# Altium PCB PCB2.PcbDoc
Units mil, origin at the board's own origin, x right, y up, seen from the top; angles counter-clockwise.
Board outline 4085.01 x 3735.03 mil, 2 copper layers (Top Layer, Bottom Layer); 45 components, 46 nets, 224 pads, 0 vias.
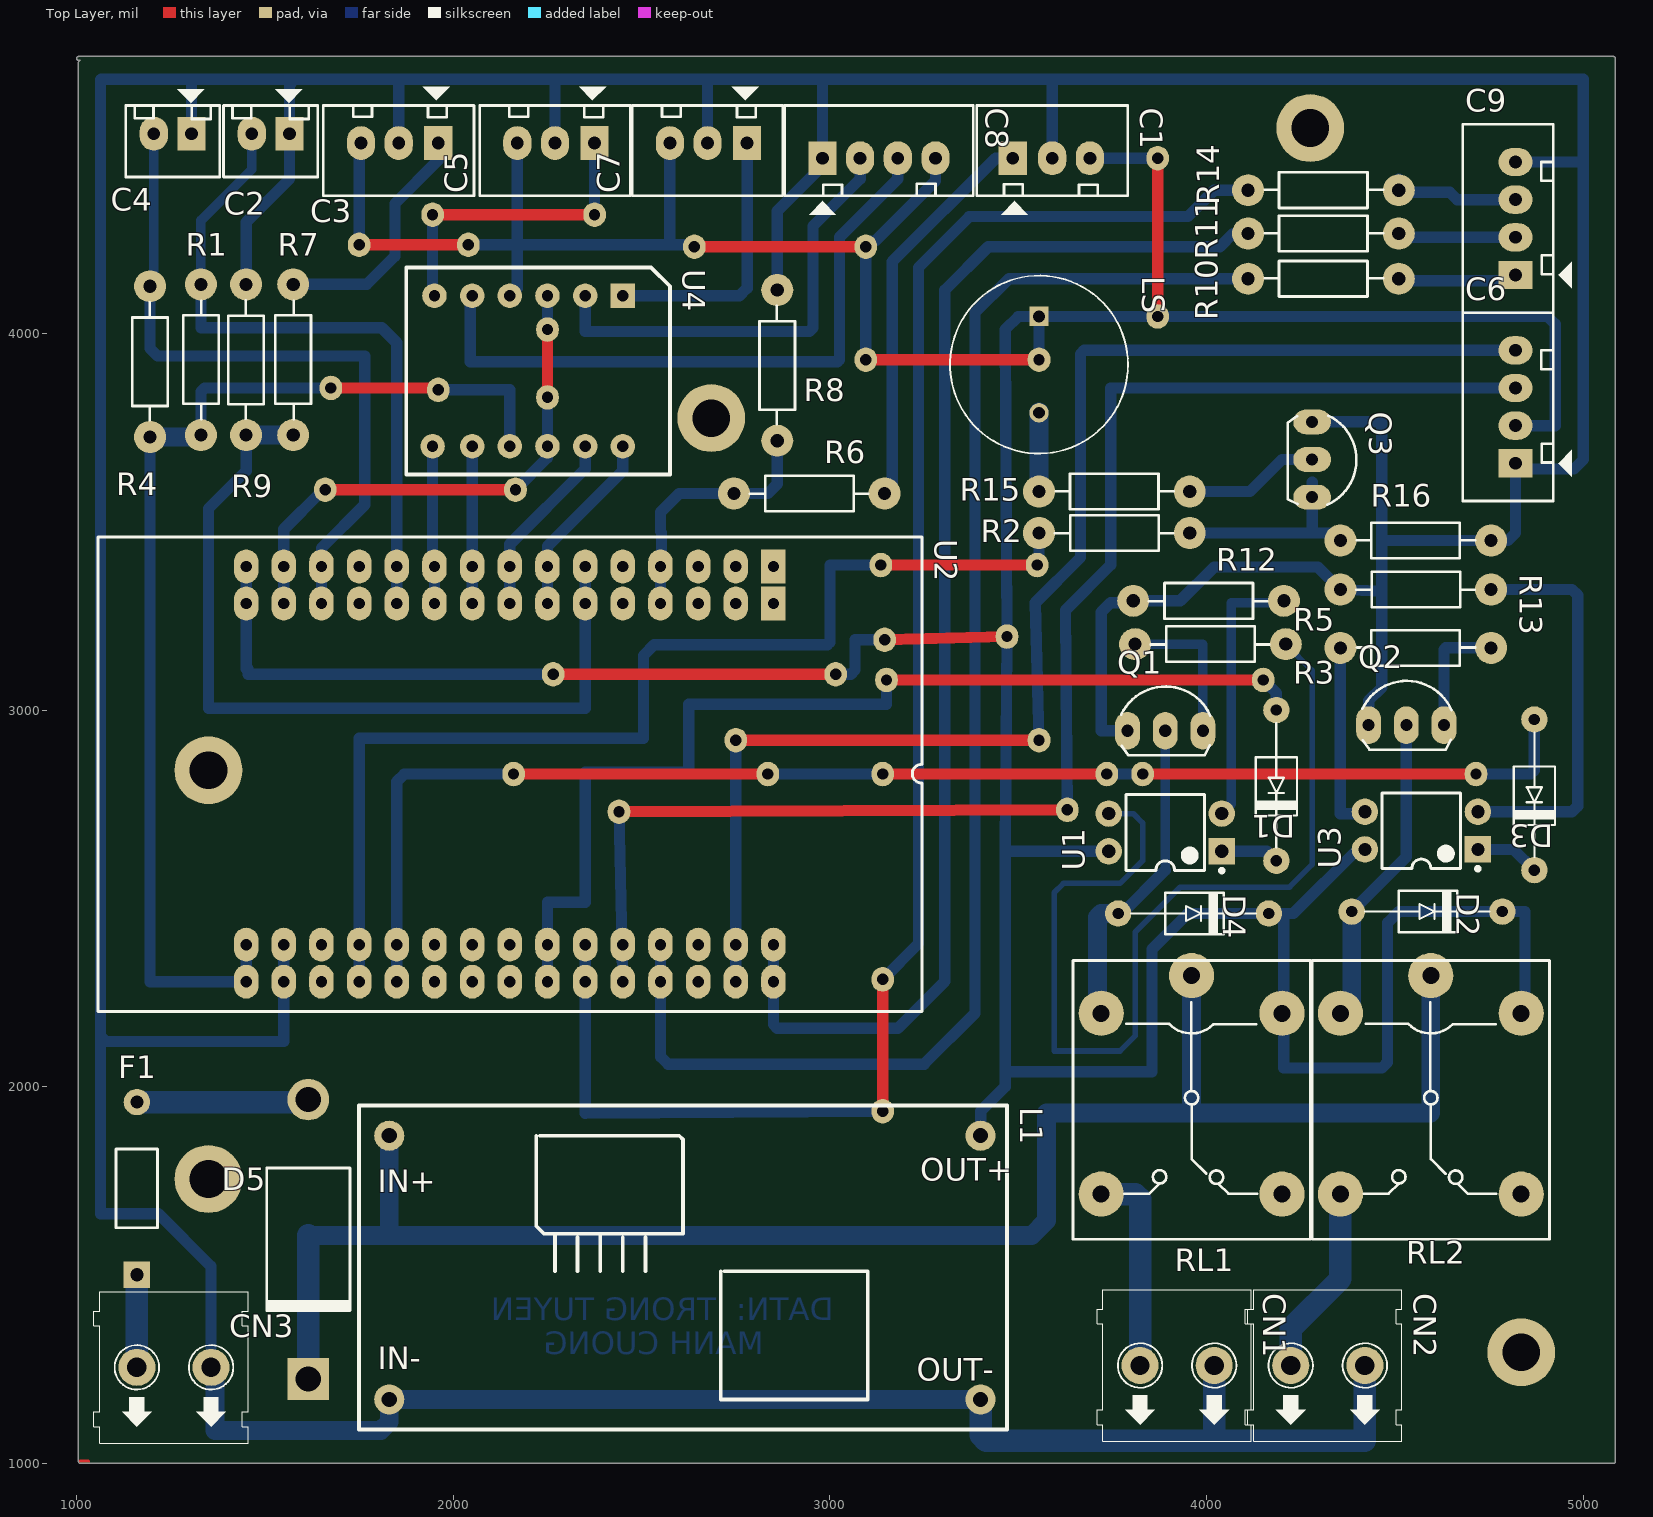
[diagram p0: Top Layer view]
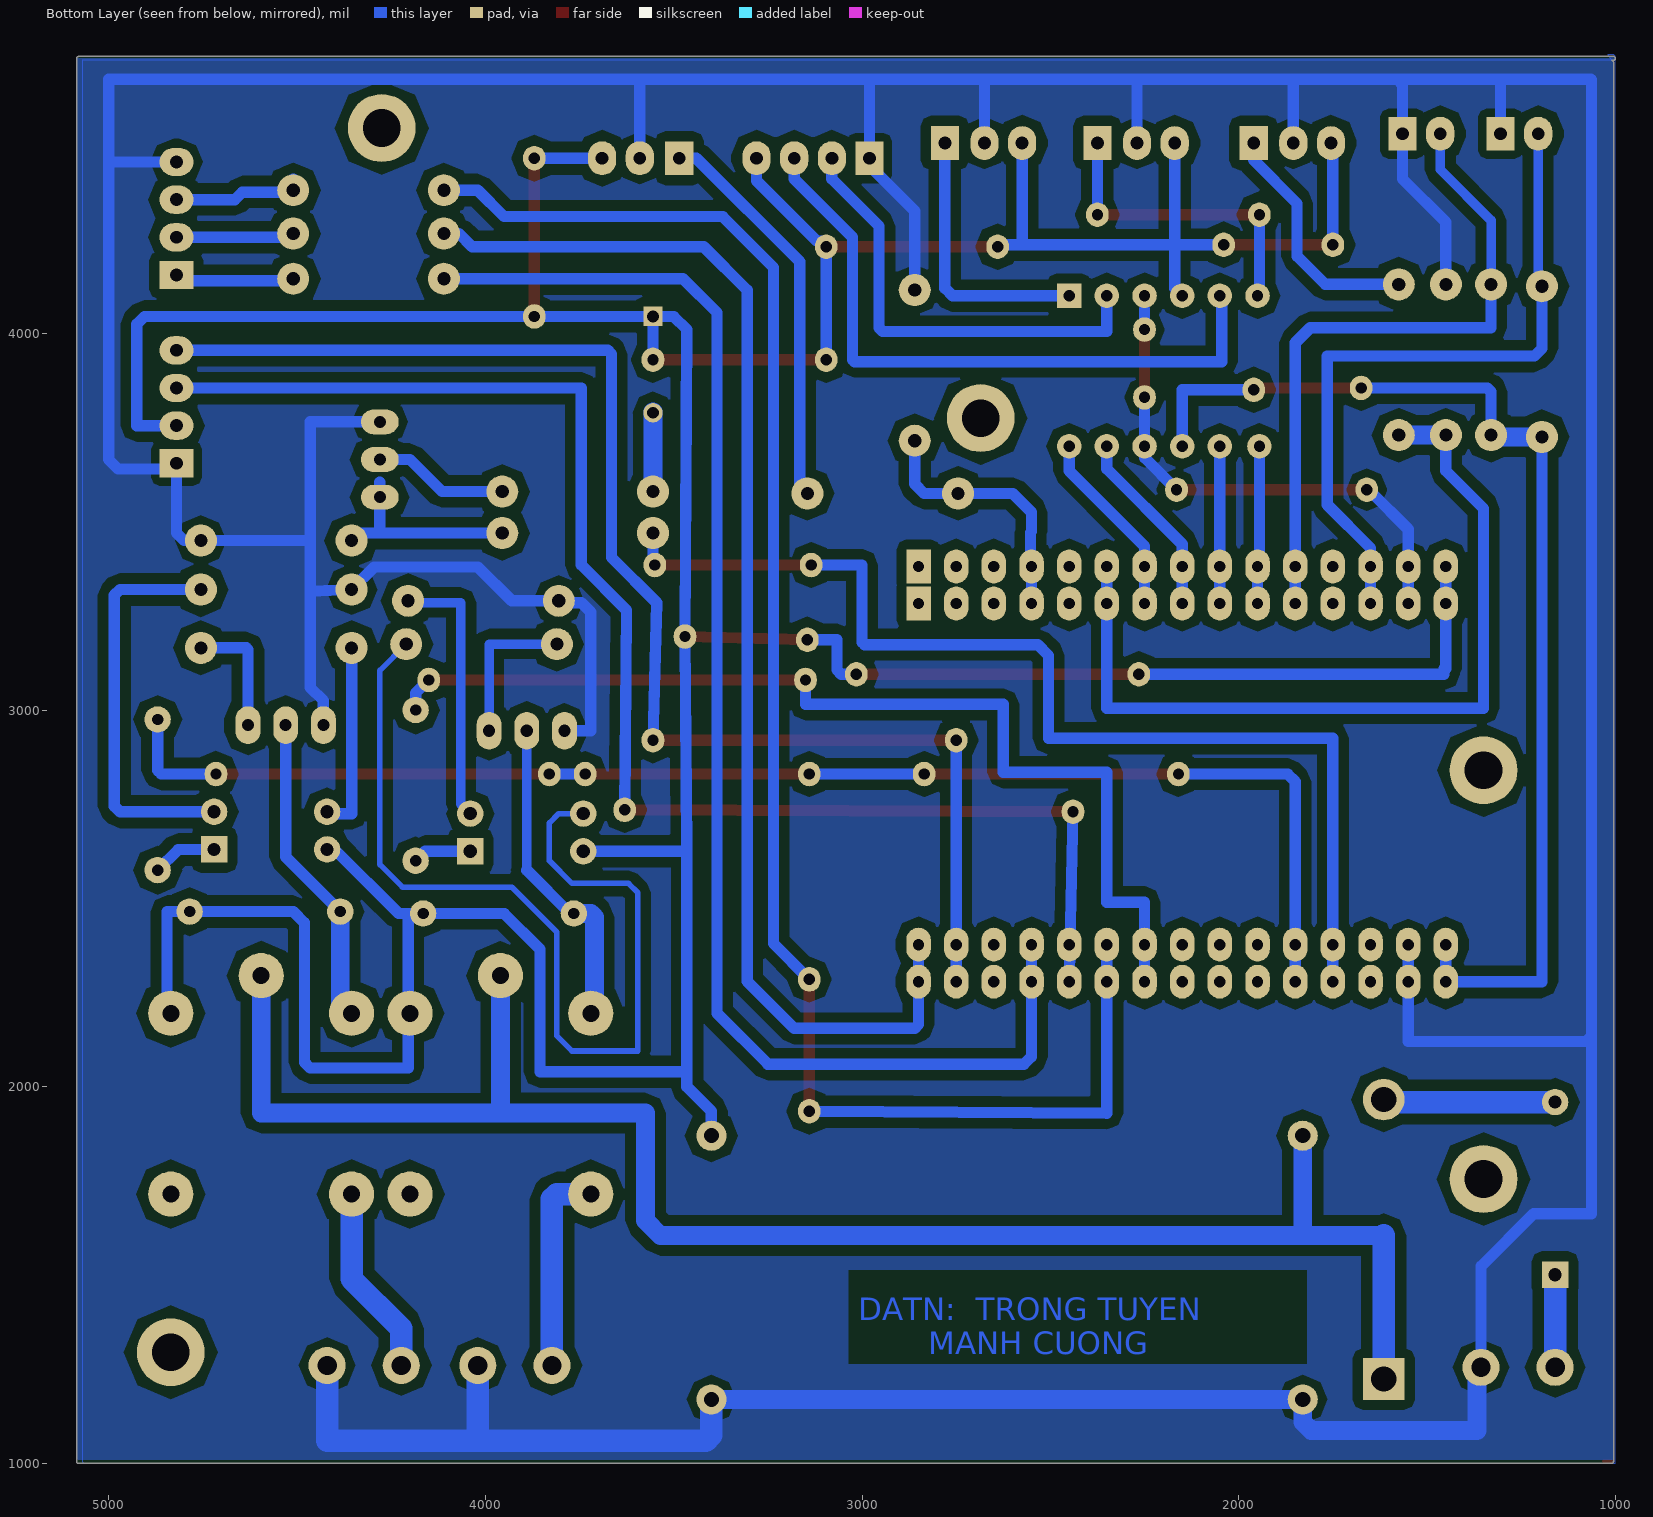
[diagram p1: Bottom Layer view, seen from below]
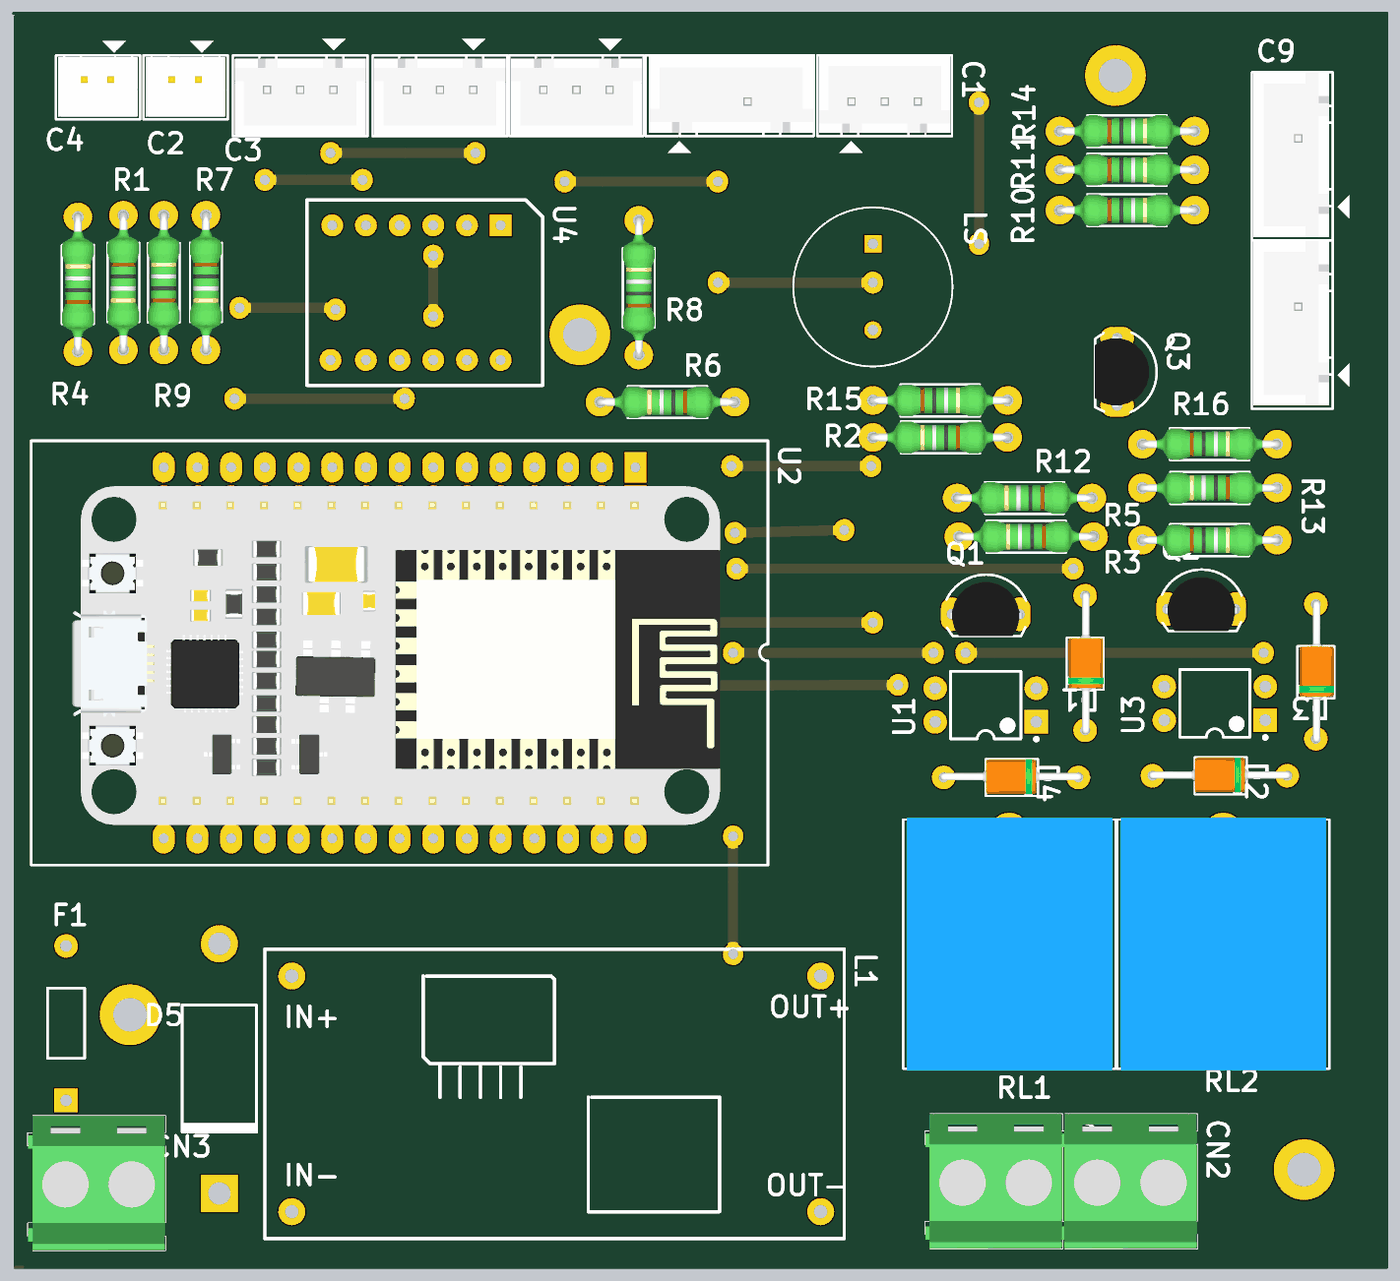
[diagram p2: 3D render of the assembled board from above, using the file's embedded part models]

## Layer stack, top to bottom
Top Solder: solder mask 0.4, Solder Resist, Dk 3.5
Top Layer: signal copper 1.4
Dielectric 1: dielectric 12.6, FR-4, Dk 4.8
Bottom Layer: signal copper 1.4
Bottom Solder: solder mask 0.4, Solder Resist, Dk 3.5

## Board outline
1004.99,1005 1004.99,4720 cw(c1010,4720) 1009.45,4724.98 1005,4724.98 cw(c1005,4730) 1005,4735.02 5080,4735.02 cw(c5080,4730) 5085.02,4730 5085.02,1005 cw(c5080,1005) 5080,999.99 1010,999.99 cw(c1010,1005)

## Design rules (kind name [scope] priority, off if disabled: settings)
Clearance [All] p1: gap=25
PlaneClearance [InNet('24VDC')] p1: clearance=40
PolygonConnect [All] p1: connectstyle=Relief reliefconductorwidth=30 reliefentries=4 polygonreliefangle="90 Angle" airgapwidth=20
RoutingVias [All] p1: holewidth=28 width=50 viastyle="Through Hole" minholewidth=28 minwidth=50 maxholewidth=28 maxwidth=50
SolderMaskExpansion [All] p1: expansion=4
Width [All] p1: maxlimit=50 minlimit=15 preferedwidth=30 minimp=50.000000 maximp=50.000000 favimp=50.000000
29 further rules are at their usual default settings.

## Components (designator, comment, footprint, x,y, rotation, side; value= is the part's Value field where it differs from the comment)
C1 "SS_pH" Header3 3490,4465 r0 top
C2 "BUTTON" Header2 1565,4530 r180 top
C3 "SS_TDS1" Header3 1955,4505 r180 top
C4 "M.NUOC" Header2 1305,4530 r180 top
C5 "L.LUONG" Header3 2370,4505 r180 top
C6 "LCD I2C" Header4 4820,3655 r90 top
C7 "BONUS" Header3 2775,4505 r180 top
C8 "SS SieuAm" Header4 2980,4465 r0 top
C9 "LED RGB" Header4 4820,4155 r90 top
CN1 "Domino2" Domino2 3823.15,1260 r270 top
CN2 "Domino2" Domino2 4223.15,1260 r270 top
CN3 "Domino2" Domino2 1160,1255 r270 top
D1 "Diode" DIO-1A 4185,3000 r270 top
D2 "Diode" DIO-1A 4385,2465 r0 top
D3 "Diode" DIO-1A 4870,2975 r270 top
D4 "Diode" DIO-1A 3765,2460 r0 top
D5 "SR5200-5A" DO-201AD 1615,1595 r270 top
F1 "Fuse Thermal" PIN-W2/E2.8 1160,1730 r90 top
L1 "BUCK_LM2596" BUCK_LM2596 2600,1550 r0 top
LS "BUZZER" XDCR_MCKPM-G1201A-K4037 3555,3917.05 r270 top
Q1 "C1815" TO92-123 3890,2945 r0 top
Q2 "C1815" TO92-123 4530,2960 r0 top
Q3 "C1815" TO92-123 4280,3665 r270 top
R1 "Res" RES-1/4W 1335,3945 r90 top
R2 "Res" RES-1/4W 3770,3465 r0 top
R3 "Res" RES-1/4W 4025,3170 r0 top
R4 "Res" RES-1/4W 1190,3910 r270 top
R5 "Res" RES-1/4W 4540,3170 r180 top
R6 "Res" RES-1/4W 2960,3570 r0 top
R7 "Res" RES-1/4W 1580,3945 r90 top
R8 "Res" RES-1/4W 2855,3900 r270 top
R9 "Res" RES-1/4W 1445,3915 r270 top
R10 "Res" RES-1/4W 4295,4150 r180 top
R11 "Res" RES-1/4W 4295,4270 r180 top
R12 "Res" RES-1/4W 4020,3285 r0 top
R13 "Res" RES-1/4W 4570,3315 r0 top
R14 "Res" RES-1/4W 4295,4385 r180 top
R15 "Res" RES-1/4W 3740,3585 r180 top
R16 "Res" RES-1/4W 4540,3455 r180 top
RL1 "Relay 10A/12V" "RELAY 5" 3960,1970 r270 top
RL2 "Relay 10A/12V" "RELAY 5" 4595,1970 r270 top
U1 "OPTO PC817" DIP-4 3890,2675 r180 top
U2 "ESP8266 MCU" ESP8266_CH340 2150,2830 r270 top
U3 "OPTO PC817" DIP-4 4570,2680 r180 top
U4 "Convert" PCB-Convert 2475,4075 r270 top

## Footprints (in the part's own frame and the unit in brackets; to place one, negate y for a bottom-side part, rotate by r counter-clockwise, add the part's x,y. Pads: shape width x height; smd on the part's side, far side on the other; paste and mask are expansions set on the pad)
BUCK_LM2596 [mil]
  round 80 hole 40: 1(-770,320) 2(-770,-380) 3(800,-380) 4(800,320)
  silkscreen extent -850,-460 870,400
DIO-1A [mil]
  round 70 hole 30: 1(0,0) 2(400,0)
  silkscreen extent 35,-55 365,55, body extent -11,-50 411,54, height 102
DIP-4 [mil] "DIP; 4 Leads; Row Spacing 7.62 mm; Pitch 2.54 mm"
  rect 70x70 hole 35: 1(-150,50)
  round 70 hole 35: 2(-150,-50) 3(150,-50) 4(150,50)
  silkscreen extent -155,-100 104,106, body extent -124,-98 124,98, height 220
DO-201AD [mm] "Diode, Axial; Body 9.5 x 5.6 mm (LxDia. max), Lead Dia. 1.32 mm (max)"
  round 2.8 hole 1.7: 1(-9.42,0)
  rect 2.8x2.8 hole 1.7: 2(9.42,0)
  silkscreen extent -4.8,-2.8 4.9,2.8
Domino2 [mm]
  round 2.5 hole 1.3: 1(0,0) 2(0,5)
  silkscreen extent -5.1,-2.9 5.1,7.5, body extent -5.1,-2.85 5.1,7.45, height 14.3
ESP8266_CH340 [mil]
  rect 90x65 hole 30: 1(-551.18,700) 1(-452.76,700)
  oval 90x65 hole 30: 2(-551.18,600) 2(-452.76,600) 3(-551.18,500) 3(-452.76,500) 4(-551.18,400) 4(-452.76,400) 5(-551.18,300) 5(-452.76,300) 6(-551.18,200) 6(-452.76,200) 7(-551.18,100) 7(-452.76,100) 8(-551.18,0) 8(-452.76,0) 9(-551.18,-100) 9(-452.76,-100) 10(-551.18,-200) 10(-452.76,-200) 11(-551.18,-300) 11(-452.76,-300) 12(-551.18,-400) 12(-452.76,-400) 13(-551.18,-500) 13(-452.76,-500) 14(-551.18,-600) 14(-452.76,-600) 15(-551.18,-700) 15(-452.76,-700) 16(452.76,-700) 16(551.18,-700) 17(452.76,-600) 17(551.18,-600) 18(452.76,-500) 18(551.18,-500) 19(452.76,-400) 19(551.18,-400) 20(452.76,-300) 20(551.18,-300) 21(452.76,-200) 21(551.18,-200) 22(452.76,-100) 22(551.18,-100) 23(452.76,0) 23(551.18,0) 24(452.76,100) 24(551.18,100) 25(452.76,200) 25(551.18,200) 26(452.76,300) 26(551.18,300) 27(452.76,400) 27(551.18,400) 28(452.76,500) 28(551.18,500) 29(452.76,600) 29(551.18,600) 30(452.76,700) 30(551.18,700)
  silkscreen extent -630,-1094 630,1094, body extent -495,-971 511,951, height 486
Header2 [mil] "CON2"
  rect 75x90 hole 34: 1(0,0)
  oval 75x90 hole 34: 2(100,0)
  silkscreen extent -75,-118 175,115, body extent -68,-70 168,107, height 236
Header3 [mil] "CON 3"
  rect 75x90 hole 34: 1(-5,0)
  oval 75x90 hole 34: 2(100,0) 3(200,0)
  silkscreen extent -100,-150 300,140, body extent -95,-90 295,136, height 276
Header4 [mil] "CON4"
  rect 75x90 hole 34: 1(0,0)
  oval 75x90 hole 34: 2(100,0) 3(200,0) 4(300,0)
  silkscreen extent -100,-150 400,140, body extent -90,-90 398,136, height 276
PCB-Convert [mil]
  rect 65x65 hole 30: 1(-25,-25)
  round 65 hole 30: 2(-25,-125) 3(-25,-225) 4(-25,-325) 5(-25,-425) 6(-25,-525) 7(375,-530) 8(375,-425) 9(375,-325) 10(375,-225) 11(375,-125) 12(375,-25)
  silkscreen extent -100,-600 450,100
PIN-W2/E2.8 [mil] "Thru-Hole; 2 Leads"
  rect 70x70 hole 35: 1(-229.33,0)
  round 70 hole 35: 2(229.33,0)
  silkscreen extent -104,-55 104,55
"RELAY 5" [mil] "Reley DPDT, 8 pin, 1A, W400mil, L800mil,H 300mil"
  round 120 hole 45: 1(-325,0) 2(255,240) 3(255,-240) 4(-225,-240) 5(-225,240)
  silkscreen extent -365,-315 375,315, body extent -371,-304 381,306, height 602
RES-1/4W [mil]
  round 85 hole 35: 1(-215,5) 2(185,5)
  silkscreen extent -173,-42 141,52, body extent -227,-42 197,52, height 95
TO92-123 [mil] "TO-92"
  oval 66x100 hole 32: 1(-100,0) 2(0,0) 3(100,0)
  silkscreen extent -117,-65 120,118, body extent -109,-66 109,95, height 245
XDCR_MCKPM-G1201A-K4037 [mm]
  rect 1.308x1.308 hole 0.8: 1(-3.25,0)
  round 1.308 hole 0.8: 2(3.25,0)
  silkscreen extent -6,-6 6,6

## Part data
C1 C3 C5 C7: library part Header3, "Header IDC, 3 x 1 Pin Vertical 2.54mm Pitch (Non-Boxed, Male)"
C2 C4: library part Header2, "Header IDC, 2 x 1 Pin Vertical 2.54mm Pitch (Non-Boxed, Male)"
C6 C8 C9: library part Header4, "Header IDC, 4 x 1 Pin Vertical 2.54mm Pitch (Non-Boxed, Male)"
D1 D2 D3 D4: "Default Diode"
D5: library part "Diode 1N5408", "3 Amp Medium Power Silicon Rectifier Diode"
F1: "Thermal Fuse"
LS: library part MCKPM-G1201A-K4037, "Zumbador y transductor magnéticos"
Q1 Q2 Q3: "NPN 600mW, ECB"
RL1 RL2: library part "Relay 5", "Relay SPDT,10A - 12VDC 5 Pin"
U1 U3: library part Optoisolator1, "4-Pin Phototransistor Optocoupler"
U4: library part "Convert Voltage Communication"

## Free pads (board coordinates)
  oval 60x65 hole 30: 2(3140,1935) 4(3140,2285) 7(3555,2920) 9(3630,2735) 11(2440,2730) 12(2750,2920) 13(1945,4315) 14(2375,4315) 15(1675,3855) 17(1960,3850) 18(3870,4045) 19(3870,4465) 20(2040,4235) 21(1750,4235) 22(3095,4230) 24(2640,4230) 25(3095,3930) 26(3555,3930) 27(2265,3095) 28(3015,3095) 29(3145,3186.48) 30(3469.91,3195) 31(3135,3385) 32(3550,3385) 33(1660,3585) 34(2165,3585) 37(3150,3080) 38(4150,3080) 39(2160,2830) 40(2835,2830) 41(3140,2830) 42(3735,2830) 43(3830,2830) 44(4715,2830) 45(2250,3830) 46(2250,4010)
  round 180 hole 100: 47(4835,1295) 48(4275,4545) 49(1350,1755) 50(1350,2840) 50(2685,3775)

## Nets (pads, with @x,y where several pads share a name; then routed paths per layer and width w, separated by ;. In a path a pad name is that pad's centre, name@x,y a point inside that pad or via, vN(x,y) a via of type N, cw(c..) or ccw(c..) an arc to the next point about the centre after c; other vN are vias at no path point)
3.3V: pad.15 pad.17 R1.1 R4.2 U2.16 U4.9 | length 3000.8
  Top Layer w30: pad.15 pad.17@1950,3855
  Bottom Layer w30: R4.2 1195,2278.82 1450,2278.82 U2.16@1450,2377.24 ; R1.1@1325,3725 R1.1 1330,3845 1340,3855 pad.15@1660,3855 ; pad.17 2150,3850 U4.9
  Bottom Layer w50: R4.2 R1.1@1325,3725
24VDC: D5.2 L1.1 RL1.1 RL2.1 | length 4657.4
  Bottom Layer w50: 1615,1605 1830,1605 ; L1.1 1830,1605 ; RL1.1 3960,2010 3960,1930 ; RL2.1 4595,1930 3960,1930 ; 1830,1605 3535,1605 3575,1645 3575,1930 3960,1930
  Bottom Layer w60: D5.2 1615,1605
Bonus: U2.7 U4.12 | length 500.1
  Bottom Layer w30: U2.7@2250,3282.76 2250,3381.18 2250,3435 2450,3635 U4.12
Bonus1: C7.1 U4.1 | length 723.3
  Bottom Layer w30: U4.1 2760,4100 2780,4120 C7.1
Button: C2.2 R1.2 U2.11 | length 1799.7
  Bottom Layer w25: R1.2 1330,4300 1465,4435 C2.2
  Bottom Layer w30: R1.2 1330,4015 1810,4015 1850,3975 1850,3381.18 U2.11@1850,3282.76
BUZZER: pad.31 pad.32 R2.1 U2.19 | length 2972.7
  Top Layer w30: pad.31 pad.32
  Bottom Layer w30: U2.19@1750,2278.82 1750,2377.24 1750,2925 2505,2925 2505,3145 2533.64,3173.64 2993.64,3173.64 3000,3180 3000,3385 pad.31 ; pad.32 3555,3390 R2.1
ENA: U2.9 U4.8 | length 417.2
  Bottom Layer w30: U2.9@2050,3282.76 2050,3381.18 U4.8
ENA1: C8.3 U4.5 | length 1758.3
  Bottom Layer w30: U4.5 2045,4095 2045,3925 3020,3925 3025,3930 3025,4255 3180,4410 C8.3
GND: C1.2 C2.1 C3.2 C4.1 C5.2 C6.1 C7.2 C8.1 C9.4 CN1.2 CN2.2 CN3.2 L1.2 L1.3 pad.33 pad.34 pad.45 pad.46 Q1.1 Q2.1 Q3.1 R8.1 R9.1 R12.1 R13.1 R16.1 U2.14 U2.17 U4.10 | length 19642.2
  Top Layer w30: pad.33 pad.34 ; pad.45 pad.46
  Bottom Layer w30: C4.1 1305,4665 1315,4675 ; CN3.2 1356.85,1523.15 1216.85,1663.15 1063.15,1663.15 1063.15,2135 ; R9.1 1450,4295 1565,4410 C2.1 1565,4660 1580,4675 ; U2.17@1550,2377.24 1550,2278.82 1550,2120 1078.15,2120 1063.15,2135 ; U2.14@1550,3282.76 1550,3381.18 1550,3480 pad.33@1650,3580 ; C3.2 1855,4665 1865,4675 ; pad.34 2250,3670 U4.10 pad.45 ; pad.46 2250,4064.29 ; C5.2 2270,4670 2275,4675 ; C7.2 2675,4665 2665,4675 ; R8.1 2860,4325 2980,4445 C8.1 2980,4670 2985,4675 ; C1.2@3590,4505 3590,4675 ; Q1.1 3720,2945 3720,3260 3745,3285 R12.1@3805,3285 ; R12.1 3930,3290 4020,3380 4295,3380 R13.1 4463.87,3315.05 4465,3316.19 ; Q3.1 4465,3765 4465,3450 ; Q2.1 4430,3025 4465,3060 4465,3316.19 ; C9.4 5000,4455 ; 1063.15,2135 1063.15,4673.15 1065,4675 1315,4675 ; 1315,4675 1580,4675 ; 1580,4675 1865,4675 ; 1865,4675 2275,4675 ; 2275,4675 2665,4675 ; 2665,4675 2985,4675 ; 2985,4675 3590,4675 ; 3590,4675 5000,4675 5000,4455 ; 4465,3316.19 4465,3450 ; 4465,3450 R16.1 4800,3450 4820,3470 4820,3640 4975,3640 5000,3665 5000,4455
  Bottom Layer w50: CN3.2 1367.5,1244.35 1367.5,1087.5 1807.5,1087.5 1830,1110 L1.2 L1.3
  Bottom Layer w60: L1.3 3400,1075 3415,1060 4020,1060 ; CN1.2 4020,1060 ; CN2.2 4420,1060 4020,1060
L.Luong: U2.10 U4.7 | length 419.3
  Bottom Layer w30: U4.7 1945,3386.18 1950,3381.18 U2.10@1950,3282.76
L.Luong1: C5.1 pad.13 pad.14 U4.6 | length 837.1
  Top Layer w30: pad.13 pad.14
  Bottom Layer w30: pad.13 1945,4105 U4.6 ; pad.14 C5.1
LED_B: R10.2 U2.27 | length 3818.7
  Bottom Layer w30: U2.27@2550,2377.24 2550,2278.82 2550,2080 2570,2060 3250,2060 3385,2195 3385,4055 3475,4145 R10.2
LED_G: R11.2 U2.30 | length 3425.3
  Bottom Layer w30: U2.30@2850,2377.24 2850,2278.82 2850,2165 2860,2155 3180,2155 3305,2280 3305,4115 3420,4230 4035,4230 4070,4265 R11.2
LED_R: pad.2 pad.4 R14.2 U2.25 | length 4493.6
  Top Layer w30: pad.4@3135,2290 pad.4 pad.2
  Bottom Layer w30: U2.25@2350,2377.24 2350,2278.82 2350,1930 pad.2 pad.2@3130,1935 ; pad.4 3235,2380 3235,4175 3370,4310 3950,4310 4020,4380 R14.2
M.Nuoc: C4.2 R4.1 U2.13 | length 1857.3
  Bottom Layer w25: R4.1 1205,4135 C4.2
  Bottom Layer w30: R4.1 1195,3960 1215,3940 1765,3940 1765,3545 1650,3430 1650,3381.18 U2.13@1650,3282.76
MOTOR: D1.1 pad.37 pad.38 U2.24 | length 2785.7
  Top Layer w30: pad.37 pad.38@4140,3080
  Bottom Layer w30: U2.24@2250,2278.82 2250,2377.24 2250,2490 2350,2490 2350,2835 2625,2835 2625,3015 3150,3015 pad.37 ; pad.38 4185,3045 D1.1
NetC9_1: C9.1 R10.1 | length 326.6
  Bottom Layer w30: R10.1@4510,4165 4535,4140 4805,4140 C9.1
NetC9_2: C9.2 R11.1 | length 320.4
  Bottom Layer w30: R11.1@4510,4280 4535,4255 C9.2
NetC9_3: C9.3 R14.1 | length 332.8
  Bottom Layer w30: R14.1@4510,4410 4545,4375 4645,4375 4665,4355 C9.3
NetCN1_1: CN1.1 RL1.3 | length 550.4
  Bottom Layer w60: RL1.3 3810,1715 3823.15,1701.85 CN1.1
NetCN2_1: CN2.1 RL2.3 | length 509.6
  Bottom Layer w60: CN2.1 4223.15,1358.15 4355,1490 RL2.3
NetCN3_1: CN3.1 F1.1 | length 245.7
  Bottom Layer w60: CN3.1 F1.1
NetD1_2: D1.2 U1.1 | length 155.4
  Bottom Layer w30: U1.1 4160,2625 D1.2
NetD2_1: D2.1 Q2.2 RL2.4 | length 767.5
  Bottom Layer w30: D2.1 4530,2610 4530,2910
  Bottom Layer w50: RL2.4 4385,2225 D2.1@4385,2445
NetD3_2: D3.2 U3.1 | length 172.8
  Bottom Layer w30: U3.1 4815,2630 D3.2
NetD4_1: D4.1 Q1.2 RL1.4 | length 825.9
  Bottom Layer w25: 3890,2575 Q1.2@3890,2910
  Bottom Layer w30: D4.1 3775,2460 3890,2575
  Bottom Layer w50: RL1.4 3710,2205 3710,2450 3720,2460 D4.1
NetD5_1: D5.1 F1.2 | length 457.7
  Bottom Layer w60: F1.2 1608.46,1959.33 D5.1
NetLS_2: LS.2 R15.2 | length 217
  Bottom Layer w50: R15.2@3555,3575 R15.2 LS.2 LS.2@3555,3792.05
NetQ1_3: Q1.3 R3.1 | length 405
  Bottom Layer w25: R3.1@3850,3175 3990,3175 Q1.3 Q1.3@3990,2910
NetQ2_3: Q2.3 R5.1 | length 327.1
  Bottom Layer w30: Q2.3 4630,3160 4635,3165 R5.1
NetQ3_2: Q3.2 R15.1 | length 360.2
  Bottom Layer w30: R15.1 4115,3580 4200,3665 Q3.2
NetQ3_3: Q3.3 R2.2 R16.2 | length 543.3
  Bottom Layer w30: R2.2 4280,3470 ; 4280,3605 Q3.3 4280,3470 ; R16.2 4335,3470 4280,3470
NetR3_2: R3.2 U1.3 | length 2555.7
  Bottom Layer w15: U1.3 3805,2725 3830,2700 3830,2600 3770,2540 3620,2540 3595,2515 3595,2095 3770,2095 3810,2135 3810,2410 3930,2530 4220,2530 4280,2590 4280,3105 R3.2
NetR5_2: R5.2 U3.3 | length 507.1
  Bottom Layer w30: R5.2 4355,2725 4415,2725 U3.3
NetR12_2: R12.2 U1.2 | length 710.4
  Bottom Layer w25: U1.2 4065,2750 4065,3285 R12.2@4205,3285
NetR13_2: R13.2 U3.2 | length 1067.4
  Bottom Layer w30: U3.2 4970,2730 4985,2745 4985,3305 4970,3320 R13.2
pH: R6.1 R8.2 U2.4 | length 658.1
  Bottom Layer w30: U2.4@2550,3325 2550,3381.18 2552.5,3383.68 2552.5,3471.49 2550,3473.99 2550,3525 2600,3575 R6.1 2835,3575 2860,3600 R8.2
pH1: C1.1 R6.2 | length 1057.2
  Bottom Layer w30: R6.2 3165,3595 3165,4190 3440,4465 C1.1
SCL: C6.4 pad.7 pad.12 U2.29 | length 3680.2
  Top Layer w30: pad.12 pad.7
  Bottom Layer w30: U2.29@2750,2278.82 2750,2377.24 pad.12 ; pad.7 3545,3285 3665,3405 3665,3945 3675,3955 C6.4
SDA: C6.3 pad.9 pad.11 U2.26 | length 3886
  Top Layer w30: pad.11 pad.9
  Bottom Layer w30: pad.11 2447.82,2377.2 U2.26@2450,2278.82 ; pad.9 3625,3265 3745,3385 3745,3855 C6.3
TDS: R7.1 R9.2 U2.6 | length 2267.6
  Bottom Layer w30: R9.2 1450,3635 1350,3535 1350,3005 2350,3005 2350,3282.76 U2.6@2350,3381.18
  Bottom Layer w50: R9.2 R7.1
TDS1: C3.1 R7.2 | length 648.7
  Bottom Layer w30: R7.2 1770,4130 1845,4205 1845,4345 1960,4460 C3.1
TX: U2.8 U4.11 | length 500.1
  Bottom Layer w30: U2.8@2150,3282.76 2150,3381.18 2150,3440 2350,3640 U4.11
TX1: C8.2 U4.2 | length 1205.9
  Bottom Layer w30: U4.2 2350,4005 2945,4005 2955,4015 2955,4285 3080,4410 C8.2
Val: D3.1 pad.39 pad.40 pad.41 pad.42 pad.43 pad.44 U2.20 | length 3698.6
  Top Layer w30: pad.39 pad.40@2835,2829.77 ; pad.41 pad.42 ; pad.43 pad.44
  Bottom Layer w30: U2.20@1850,2278.82 1850,2377.24 1850,2810 1870,2830 pad.39 ; pad.40 pad.41 ; pad.42 pad.43 ; pad.44 4860,2830 4870,2840 D3.1
VCC: C1.3 C3.3 C5.3 C6.2 C7.3 C8.4 D2.2 D4.2 L1.4 LS.1 pad.18 pad.19 pad.20 pad.21 pad.22 pad.24 pad.25 pad.26 pad.27 pad.28 pad.29 pad.30 RL1.5 RL2.5 U1.4 U2.15 U3.4 U4.4 | length 13868.7
  Top Layer w30: pad.21 pad.20 ; pad.27 pad.28 ; pad.24 pad.22 ; pad.25 pad.26 ; pad.29 pad.30 ; pad.18 pad.19
  Bottom Layer w30: U2.15@1450,3381.18 1450,3282.76 1450,3110 1455,3110 1455,3095 pad.27 ; pad.21 1750,4500 C3.3 ; pad.20@2050,4235 2170,4235 ; U4.4 2170,4120 2170,4235 ; C5.3 2170,4235 ; C7.3 2575,4235 ; pad.24 2635,4235 2575,4235 ; pad.28 3055,3095 3066.48,3106.48 3066.48,3186.48 pad.29 ; pad.25 pad.22 ; pad.22@3106.57,4245 3120,4245 3280,4405 C8.4 ; L1.4 3400,1935 3465,2000 3465,2040 ; pad.26 LS.1 ; C1.3 pad.19 ; U1.4 3475,2625 3465,2635 ; U3.4 4400,2630 4230,2460 4205,2460 ; C6.2 4925,3755 4925,4025 4905,4045 pad.18 LS.1 ; RL2.5 4845,2205 4845,2465 D2.2 4510,2465 4480,2435 4480,2065 4465,2050 4205,2050 4205,2190 RL1.5 4205,2200 4205,2460 ; 2170,4235 2575,4235 ; 3465,2040 3465,2635 ; 3465,2040 3855,2040 3855,2365 3950,2460 D4.2 4205,2460 ; 3465,2635 pad.30 3465,4010 3500,4045 LS.1
pads on no net: RL1.2 RL2.2 U2.1 U2.2 U2.3 U2.5 U2.12 U2.18 U2.21 U2.22 U2.23 U2.28 U4.3
copper on no net: | length 46.9
  Top Layer w10: 1010,1005 1030,1005
  Bottom Layer w30: 1950,2363.82 1950,2377.24 ; 2650,2363.82 2650,2377.24

## Polygon pours and split planes (outlines as drawn)
GND on Bottom Layer "Bottom Layer-No Net" (solid, shelved, pour order 2): 1010,4725 5070,4725 5070,1005 5065,1000 1000,1000 1000,4735 1005,4740 1020,4740
GND on Bottom Layer "Bottom Layer-No Net" (solid, pour order 10): 1010,4735 1015,4730 5085,4730 5085,1005 5080,1010 1005,1010 1005,4730

## Other copper
Bottom Layer:
  text "DATN:  TRONG TUYEN /        MANH CUONG" at 3010,1290 h60

## Text inside footprints (layer, text, board x,y; h text height)
L1: Top Overlay "IN+" at 1800,1720 h60; Top Overlay "IN-" at 1800,1250 h60; Top Overlay "OUT+" at 3240,1750 h60; Top Overlay "OUT-" at 3230,1220 h60